# EAGLE board avr_lag1 (EAGLE 5.07)
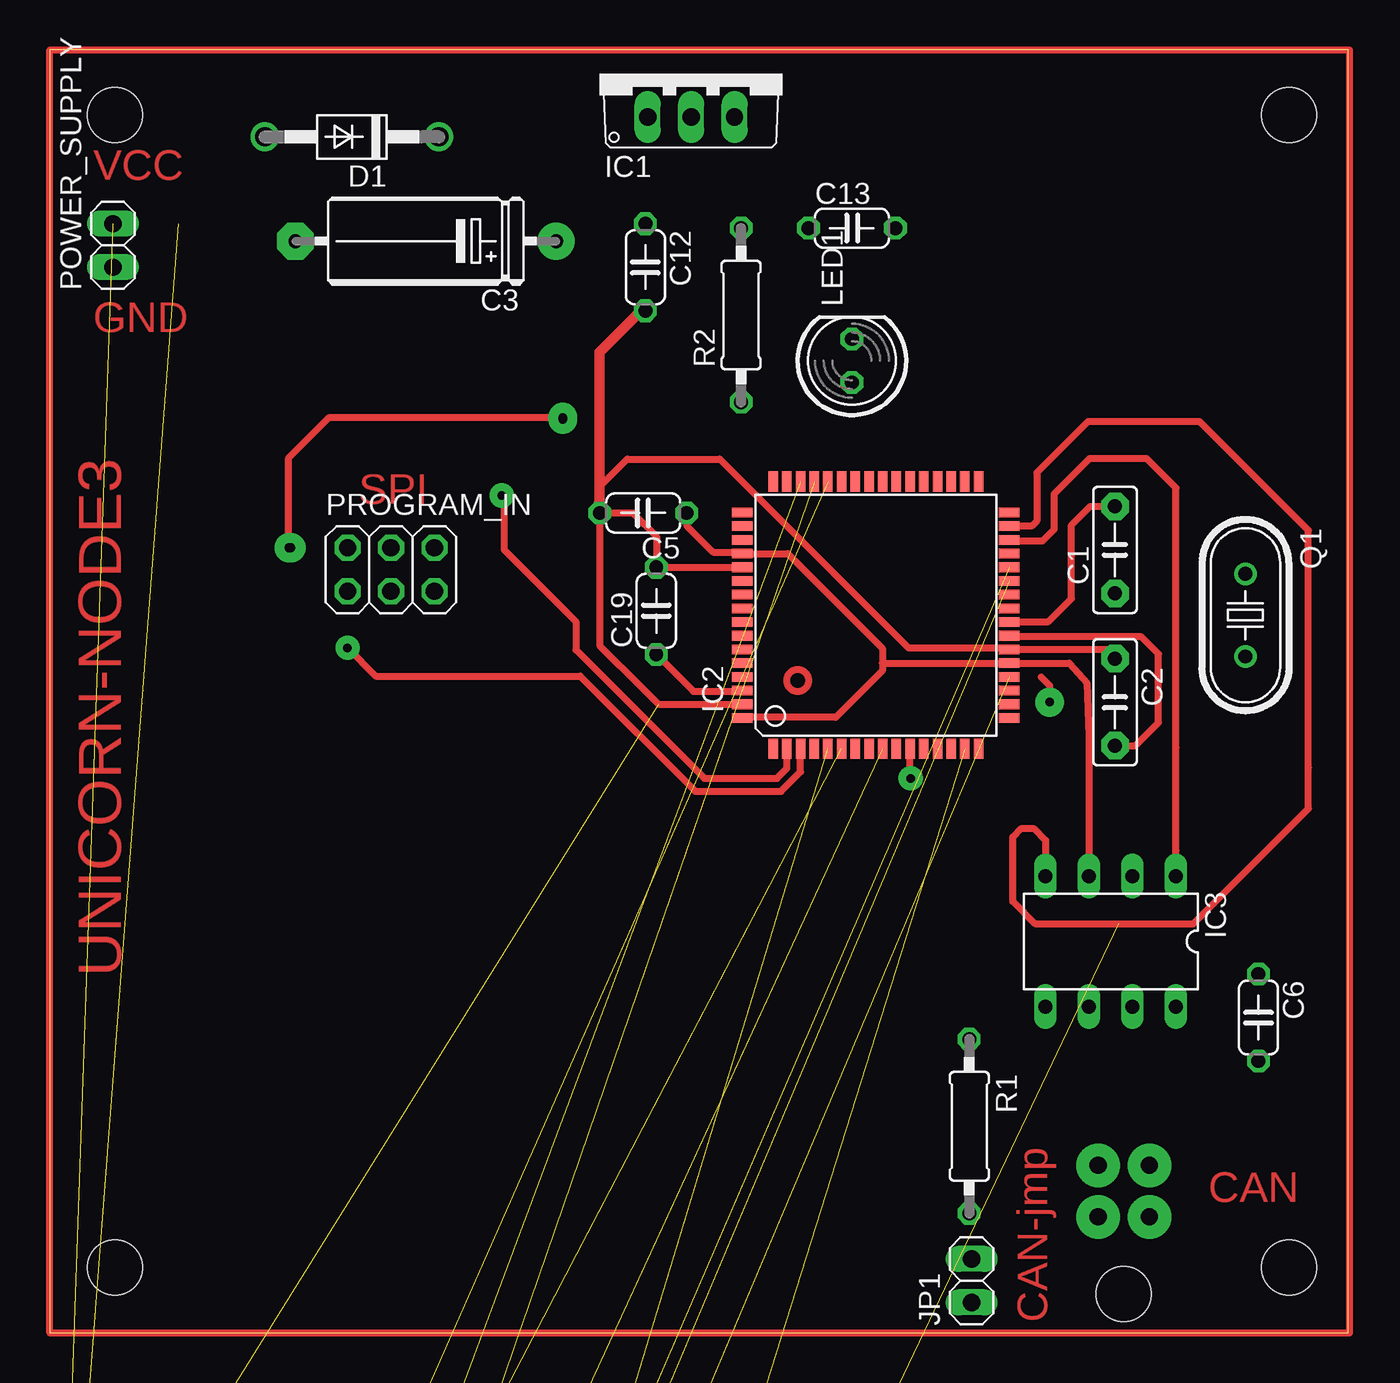
[diagram p0: board, top side]
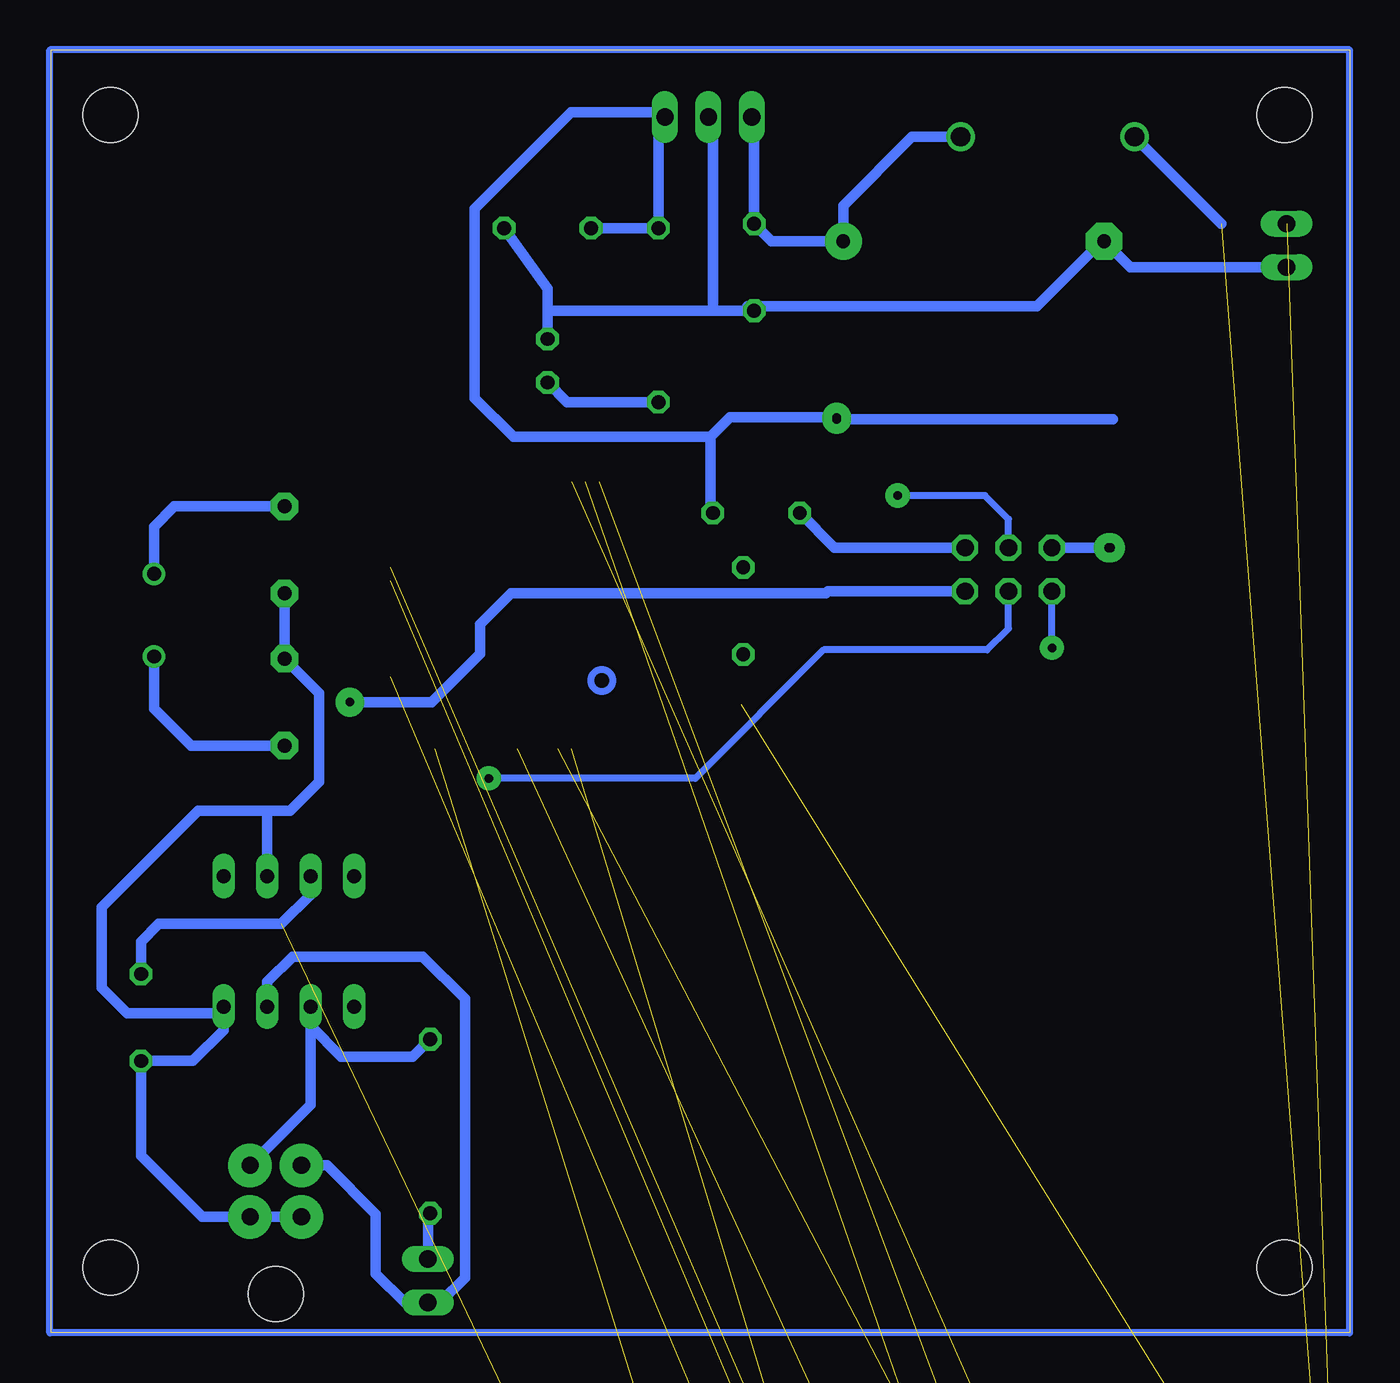
[diagram p1: board, bottom side, seen from below]

Size 75.87 x 74.92 mm. Coordinates in mm from the lower left corner, seen from the top.
Outline: 0,0 75.87,0 75.87,74.92 0,74.92 0,0
Copper layers (1*16): Top 0.035mm / dielectric 1.5mm / Bottom 0.035mm
Design rules "default": minimum track width 10mil, minimum drill 24mil, track to track 8mil, track to pad 8mil, pad to pad 8mil, via to via 8mil, smd to smd 8mil, copper to edge 40mil, drill to drill 8mil, minimum pad ring 10mil, minimum via ring 8mil, stop-mask expansion 4mil, vias tented up to drill 0mil, thermal gap 10mil
Holes 3.2 mm at 3.81,3.81 3.81,71.12 72.39,71.12 72.39,3.81

## Footprints (pad centres in the part's own frame; a part is rotated, then mirrored left to right if it is on the bottom)
C5B2.5 = drill 0.813 pad 1.6 octagon: 1 -2.54,0; 2 2.54,0
E15-5 = drill 0.813 pad 2.159 round: + -7.62,0 | drill 0.813 pad 2.159 octagon: - 7.62,0
C025-024X044 = drill 0.813 octagon: 1 -1.27,0; 2 1.27,0
C050-024X044 = drill 0.813 octagon: 1 -2.54,0; 2 2.54,0
DO41-10 = drill 1.118 round: A 5.08,0; C -5.08,0
GSH15 = drill 1.321 pad 2.54 long: 1 -7.62,0; 2 7.62,0 | hole 2.794: 0,0
TO220V = drill 1.016 long: 1 -2.54,-2.54; 2 0,-2.54; 3 2.54,-2.54
TQFP64 = smd 1.194 x 0.559: 1 -7.8,6; 2 -7.8,5.2; 3 -7.8,4.4; 4 -7.8,3.6; 5 -7.8,2.8; 6 -7.8,2; 7 -7.8,1.2; 8 -7.8,0.4; 9 -7.8,-0.4; 10 -7.8,-1.2; 11 -7.8,-2; 12 -7.8,-2.8; 13 -7.8,-3.6; 14 -7.8,-4.4; 15 -7.8,-5.2; 16 -7.8,-6; 33 7.8,-6; 34 7.8,-5.2; 35 7.8,-4.4; 36 7.8,-3.6; 37 7.8,-2.8; 38 7.8,-2; 39 7.8,-1.2; 40 7.8,-0.4; 41 7.8,0.4; 42 7.8,1.2; 43 7.8,2; 44 7.8,2.8; 45 7.8,3.6; 46 7.8,4.4; 47 7.8,5.2; 48 7.8,6 | smd 0.559 x 1.194: 17 -6,-7.8; 18 -5.2,-7.8; 19 -4.4,-7.8; 20 -3.6,-7.8; 21 -2.8,-7.8; 22 -2,-7.8; 23 -1.2,-7.8; 24 -0.4,-7.8; 25 0.4,-7.8; 26 1.2,-7.8; 27 2,-7.8; 28 2.8,-7.8; 29 3.6,-7.8; 30 4.4,-7.8; 31 5.2,-7.8; 32 6,-7.8; 49 6,7.8; 50 5.2,7.8; 51 4.4,7.8; 52 3.6,7.8; 53 2.8,7.8; 54 2,7.8; 55 1.2,7.8; 56 0.4,7.8; 57 -0.4,7.8; 58 -1.2,7.8; 59 -2,7.8; 60 -2.8,7.8; 61 -3.6,7.8; 62 -4.4,7.8; 63 -5.2,7.8; 64 -6,7.8
DIL08 = drill 0.813 long: 1 -3.81,-3.81; 2 -1.27,-3.81; 3 1.27,-3.81; 4 3.81,-3.81; 5 3.81,3.81; 6 1.27,3.81; 7 -1.27,3.81; 8 -3.81,3.81
DIL08' = drill 0.813 pad 1.27 round: 1 -3.81,-3.81; 2 -1.27,-3.81; 3 1.27,-3.81; 4 3.81,-3.81; 5 3.81,3.81; 6 1.27,3.81; 7 -1.27,3.81; 8 -3.81,3.81
1X02 = drill 1.016 long: 1 -1.27,0; 2 1.27,0
LED5MM = drill 0.813 octagon: A -1.27,0; K 1.27,0
2X03 = drill 1.016 octagon: 1 -2.54,-1.27; 2 -2.54,1.27; 3 0,-1.27; 4 0,1.27; 5 2.54,-1.27; 6 2.54,1.27
HC49U70 = drill 0.813 round: 1 -2.413,0; 2 2.413,0
TO92 = drill 0.813 octagon: 1 1.27,0; 2 0,1.905; 3 -1.27,0
0207/10 = drill 0.813 octagon: 1 -5.08,0; 2 5.08,0
MICROFIT4SOCK = drill 1 pad 2.54 round: PIN1 -2,0; PIN2 1,0; PIN3 -2,-3; PIN4 1,-3 | hole 3.2: -0.5,-7.5
1X03 = drill 1.016 long: 1 -2.54,0; 2 0,0; 3 2.54,0

## Placement (x,y rotation side)
C1  22pF  [C5B2.5]  62.23,45.72 90 top
C2  22pF  [C5B2.5]  62.23,36.83 270 top
C3  330uF  [E15-5]  21.97,63.75 180 top
C4  100nF  [C025-024X044]  1.52,-15.88 0 top  (outside the outline)
C5  100nF  [C050-024X044]  34.67,47.88 180 top
C6  100nF  [C050-024X044]  70.61,18.41 270 top
C7  100nF  [C025-024X044]  0,-63.37 0 top  (outside the outline)
C10  100nF  [C025-024X044]  -6.35,-132.72 0 top  (outside the outline)
C12  100nF  [C050-024X044]  34.8,62.23 270 top
C13  100nF  [C050-024X044]  46.86,64.52 0 top
C19  100nF  [C050-024X044]  35.43,42.16 90 top
D1  1N4004  [DO41-10]  17.65,69.85 180 top
F1  [GSH15]  3.68,-151.89 0 top  (outside the outline)
IC1  7805TV  [TO220V]  37.47,73.53 0 top
IC2  MEGA128-A  [TQFP64]  48.26,41.91 90 top
IC3  PCA82C250  [DIL08]  61.98,22.86 180 top
IC5  TL072P  [DIL08']  -1.65,-140.97 0 top  (outside the outline)
JP1  [1X02]  53.85,3.05 90 top
LED1  [LED5MM]  46.86,56.77 90 top
POWER_SUPPLY  [1X02]  3.68,63.5 90 top
PROGRAM_IN  [2X03]  19.94,44.58 0 top
Q1  18.4320 MHz  [HC49U70]  69.85,41.91 270 top
Q2  BC547B  [TO92]  -6.6,-159.89 0 top  (outside the outline)
Q3  BC547B  [TO92]  -46.48,-174.37 0 top  (outside the outline)
R1  120  [0207/10]  53.72,12.06 270 top
R2  250  [0207/10]  40.39,59.44 90 top
R3  10k  [0207/10]  4.83,-35.31 0 top  (outside the outline)
R4  10k  [0207/10]  4.45,-40.26 0 top  (outside the outline)
R5  10k  [0207/10]  4.06,-45.21 0 top  (outside the outline)
R6  10k  [0207/10]  10.79,-63.37 0 top  (outside the outline)
R7  10k  [0207/10]  4.06,-69.98 0 top  (outside the outline)
R8  10k  [0207/10]  4.06,-74.93 0 top  (outside the outline)
R9  250  [0207/10]  -3.68,-165.61 0 top  (outside the outline)
R10  1k  [0207/10]  -43.18,-180.21 0 top  (outside the outline)
R11  1k  [0207/10]  -43.56,-185.17 0 top  (outside the outline)
U$1  MICROFIT4  [MICROFIT4SOCK]  63.25,9.78 0 top
U$2  MICROFIT4  [MICROFIT4SOCK]  -12.7,-157.99 0 top  (outside the outline)
U$3  MICROFIT4  [MICROFIT4SOCK]  -19.3,-158.62 0 top  (outside the outline)
U$4  MICROFIT4  [MICROFIT4SOCK]  -25.91,-159.26 0 top  (outside the outline)
U$5  MICROFIT4  [MICROFIT4SOCK]  -32.51,-159.89 0 top  (outside the outline)
U$6  MICROFIT4  [MICROFIT4SOCK]  -39.12,-160.53 0 top  (outside the outline)
U$7  MICROFIT4  [MICROFIT4SOCK]  -45.72,-161.16 0 top  (outside the outline)
UART  [1X03]  -45.72,-196.47 0 top  (outside the outline)

## Library data of the parts
C1 C2 = capacitor-wima
C3-C7 C10 C12 C13 C19 = rcl
D1 = diode
F1 = fuse
IC1 IC5 = linear
IC2 = atmel
IC3 = micro-philips
JP1 POWER_SUPPLY PROGRAM_IN UART = pinhead
LED1 = led
Q1 = crystal
Q2 Q3 = transistor-npn
R1-R11 = resistor
U$1-U$7 = UNICORN

## Nets
+5V: C5.1 C6.1 C13.1 IC1.3 IC2.21 IC2.52 IC2.64 IC3.3 PROGRAM_IN.2 R2.2 R11.1 U$4.PIN2 U$5.PIN2 U$7.PIN2
CANJUMP1: IC3.7 JP1.1 U$1.PIN1
CANJUMP2: JP1.2 R1.2
CS: IC2.10
GEARPOT: IC2.46 U$5.PIN1
KOBLINGPOT: IC2.45 U$4.PIN1
MISO/TXD0: IC2.3 PROGRAM_IN.1
MOSI/RXD0: IC2.2 PROGRAM_IN.4
MOTORPWM12VOUT: Q2.3 R9.1 U$2.PIN1 U$2.PIN2
N$1: C1.2 IC2.24 Q1.1
N$2: C2.2 IC2.23 Q1.2
N$5: F1.1 POWER_SUPPLY.2
N$6: LED1.A R2.1
N$10: C19.1 IC2.62
N$12: C4.1 IC5.5 R3.1
N$13: IC2.20 R11.2
N$15: IC5.6 R4.2 R5.1
N$16: C7.1 IC5.3 R6.1
N$19: IC5.2 R7.2 R8.1
N$20: C3.+ C12.1 D1.C IC1.1
N$30: IC2.51
N$31: IC2.50
N$32: IC2.49
N$33: IC2.48
N$34: IC2.47
N$51: IC3.6 R1.1 U$1.PIN2
PE: C1.1 C2.1 C3.- C4.2 C5.2 C6.2 C7.2 C10.2 C12.2 C13.2 C19.2 IC1.2 IC2.22 IC2.53 IC2.63 IC3.2 IC3.8 IC5.4 LED1.K POWER_SUPPLY.1 PROGRAM_IN.6 Q2.1 Q3.1 R5.2 R8.2 U$1.PIN3 U$1.PIN4 U$2.PIN3 U$2.PIN4 U$3.PIN3 U$3.PIN4 U$4.PIN3 U$4.PIN4 U$5.PIN3 U$5.PIN4 U$6.PIN3 U$6.PIN4 U$7.PIN3 U$7.PIN4 UART.3
PRESSADC: IC2.44 U$7.PIN1
PWMTOMOTOR: IC2.15 Q2.2
PWMTOMUX1: IC2.5 R6.2
PWMTOMUX2: IC2.6 R3.2
RESET: PROGRAM_IN.5
RXCAN: IC2.31 IC3.4
RXD1: IC2.27 UART.2
SCK: IC2.11 PROGRAM_IN.3
SDMISO: IC2.13
SDMOSI: IC2.12
TXCAN: IC2.30 IC3.1
TXD1: IC2.28 UART.1
TÆNDINGSCUT: IC2.9 Q3.2
TÆNDINGSCUTOUT: Q3.3 R10.1 U$6.PIN1 U$6.PIN2
VCC: C10.1 D1.A F1.2 IC5.8 R9.2 R10.2
VOLTAGETOMUX1: IC5.1 R7.1 U$3.PIN1
VOLTAGETOMUX2: IC5.7 R4.1 U$3.PIN2

## Tracks (layer width: path | path; a pad name or v marks a point on that pad's centre or on a via)
+5V  (via drill 0.5 pad 1.68)  (4 unrouted)
  Top 0.254: C6.1 70.87,21.21
  Top 0.406: C5.1 37.21,47.14 38.76,45.59 40.46,45.59 IC2.52 43.12,45.51 48.64,39.98 48.64,39.12 | IC2.21 59.56,39.12 60.58,37.97 60.71,34.82 IC3.3 60.71,27.79 | 48.64,39.12 IC2.21 | IC2.21 | 48.64,39.12 48.64,38.66 45.92,35.94 40.46,35.94 IC2.64 | v14.1,45.85 13.97,45.85 13.97,51.1 16.33,53.47 v29.97,53.47
  Bottom 0.61: C13.1 R2.2 40.39,70.99 IC1.3 40.01,71.29 45.48,71.29 51.12,65.66 51.12,54.59 48.85,52.32 37.34,52.32 | C6.1 70.61,22.85 69.59,23.88 62.41,23.88 60.71,25.59 IC3.3 | v14.1,45.85 PROGRAM_IN.2 | C5.1 37.34,47.88 37.34,52.32 | 37.34,52.32 37.34,52.33 36.2,53.47 v29.97,53.47 29.97,53.34 13.85,53.34
CANJUMP1
  Bottom 0.61: IC3.7 63.25,20.49 61.77,21.97 54.16,21.97 51.69,19.5 51.69,3.23 53.14,1.78 JP1.1 54.1,1.78 55.23,1.78 56.9,3.45 56.9,6.94 59.74,9.78 U$1.PIN1
CANJUMP2
  Bottom 0.61: R1.2 53.85,6.99 JP1.2
CS
  Top 0.406: IC2.10 49.53,34.11
GEARPOT  (1 unrouted)
KOBLINGPOT  (1 unrouted)
MISO/TXD0  (via drill 0.5 pad 1.42)
  Top 0.406: v17.4,40.01 19.05,38.35 30.99,38.35 37.72,31.62 42.73,31.62 43.86,32.75 IC2.3
  Bottom 0.406: v17.4,40.01 PROGRAM_IN.1
MOSI/RXD0  (via drill 0.5 pad 1.42)
  Top 0.406: v26.42,48.9 26.54,48.9 26.54,45.72 30.73,41.53 30.73,39.89 38.24,32.38 42.49,32.38 43.06,32.96 IC2.2
  Bottom 0.406: PROGRAM_IN.4 19.94,47.52 21.31,48.9 v26.42,48.9
MOTORPWM12VOUT  (3 unrouted)
N$1
  Top 0.406: C1.2 60.78,48.26 59.69,47.17 59.69,42.88 58.34,41.53 56.06,41.53 IC2.24
  Bottom 0.61: C1.2 68.68,48.26 69.85,47.09 Q1.1
N$2
  Top 0.406: 56.06,40.64 IC2.23 56.06,40.64 | C2.2 63.42,34.29 64.77,35.64 64.77,39.65 63.78,40.64 56.06,40.64
  Bottom 0.61: C2.2 67.69,34.29 69.85,36.45 Q1.2
N$3  (via drill 0.5 pad 1.68)
  other vias: 58.42,36.83
N$4  (via drill 0.5 pad 1.68)
  other vias: 29.97,53.34
N$5  (1 unrouted)
N$6
  Bottom 0.61: R2.1 45.72,54.36 LED1.A
N$7  (via drill 0.5 pad 1.68)
  other vias: 13.97,45.85
N$9
  Top 0.406: 0,74.93 75.95,74.93 75.95,0 75.82,0 0,0 0,74.93
N$10
  Top 0.406: C19.1 35.56,39.62 35.56,39.51 37.61,37.47 40.46,37.47 IC2.62
N$11
  Bottom 0.406: 0,74.93 75.95,74.93 75.95,0.13 75.95,0 0,0 0,74.93
N$12  (2 unrouted)
N$13  (1 unrouted)
N$15  (2 unrouted)
N$16  (2 unrouted)
N$19  (2 unrouted)
N$20
  Bottom 0.61: D1.C 25.57,69.85 29.59,65.83 C3.+ 33.78,63.75 C12.1 34.8,70.99 IC1.1
N$51
  Bottom 0.61: R1.1 54.74,16.13 58.91,16.13 60.71,17.93 IC3.6 60.71,13.32 U$1.PIN2
PE  (21 unrouted)
  Top 0.406: IC2.53 C19.2 35.43,46.51 34.06,47.88 C5.2 31.88,47.88 | IC2.63 35.56,36.71 34.55,37.72 32.13,40.14 32.13,47.75 31.88,47.88 | 31.88,47.88 32.13,49.42 33.74,51.03 39.14,51.03 50.16,40.01 56.06,40.01 IC2.22 62.23,39.91 C2.1
  Top 0.61: C12.2 34.54,59.69 32.13,57.28 32.13,49.42 C5.2
  Bottom 0.61: C13.2 46.86,60.96 LED1.K 46.86,59.69 37.21,59.69 | 37.21,59.69 C12.2 35.18,59.94 18.29,59.94 14.48,63.75 C3.- 12.83,62.23 POWER_SUPPLY.1 | C1.1 C2.1 60.2,37.34 60.2,32.19 61.91,30.48 63.25,30.48 | C5.2 30.1,45.85 PROGRAM_IN.6 | U$1.PIN3 U$1.PIN4 67.05,6.78 70.61,10.34 C6.2 67.59,15.88 65.79,17.68 IC3.8 65.79,18.67 71.42,18.67 72.9,20.15 72.9,24.85 67.27,30.48 63.25,30.48 | 63.25,30.48 IC3.2 | IC1.2 37.21,70.99 37.21,59.69
PRESSADC  (1 unrouted)
PWMTOMOTOR  (1 unrouted)
PWMTOMUX1  (1 unrouted)
PWMTOMUX2  (1 unrouted)
RESET  (via drill 0.5 pad 1.68)
  Top 0.406: v58.42,36.83 58.42,37.8 57.91,38.31
  Bottom 0.61: v58.42,36.83 53.64,36.83 50.8,39.67 50.8,41.38 49,43.18 30.61,43.18 30.48,43.31 PROGRAM_IN.5
RXCAN
  Top 0.406: 58.29,26.67 IC3.4 58.17,28.78 57.48,29.46 56.77,29.46 56.26,28.96 56.26,25.2 57.56,23.9 60.61,23.88 63.12,23.88 66.8,23.88 73.53,30.61 73.53,33.02 73.53,46.86 67.18,53.21 60.66,53.21 57.66,50.22 57.66,47.4 57.37,47.12 IC2.31
RXD1  (1 unrouted)
SCK  (via drill 0.5 pad 1.42)
  Top 0.406: 50.29,34.11 IC2.11 50.26,32.38 v50.29,32.38
  Bottom 0.406: PROGRAM_IN.3 19.94,41.13 21.19,39.88 30.73,39.88 38.23,32.38 v50.29,32.38
TXCAN
  Top 0.406: IC2.30 56.06,46.23 57.99,46.23 58.67,46.91 58.67,48.99 60.74,51.05 64.08,51.05 65.79,49.35 65.79,34.19 65.79,28.17 IC3.1
TXD1  (1 unrouted)
TÆNDINGSCUT  (1 unrouted)
TÆNDINGSCUTOUT  (3 unrouted)
VCC  (5 unrouted)
  Bottom 0.61: 7.49,64.77 D1.A
VOLTAGETOMUX1  (2 unrouted)
VOLTAGETOMUX2  (2 unrouted)
(copper drawn outside any net)
  shapes: Bottom circle x6, Top circle x6

## Text on the board
Top: VCC | GND | SPI | UNICORN-NODE3 | CAN | CAN-jmp